# Altium PCB Hoang.PcbDoc
Units mm, origin at the board's own origin, x right, y up, seen from the top; angles counter-clockwise.
Board outline 79.99 x 80 mm, 4 copper layers (L1-T, L2-Power, L3-GND, L4-B), stack 0.778 mm thick; 96 components, 75 nets, 356 pads, 112 vias.
Unrouted connection lines stored in the file: 110.
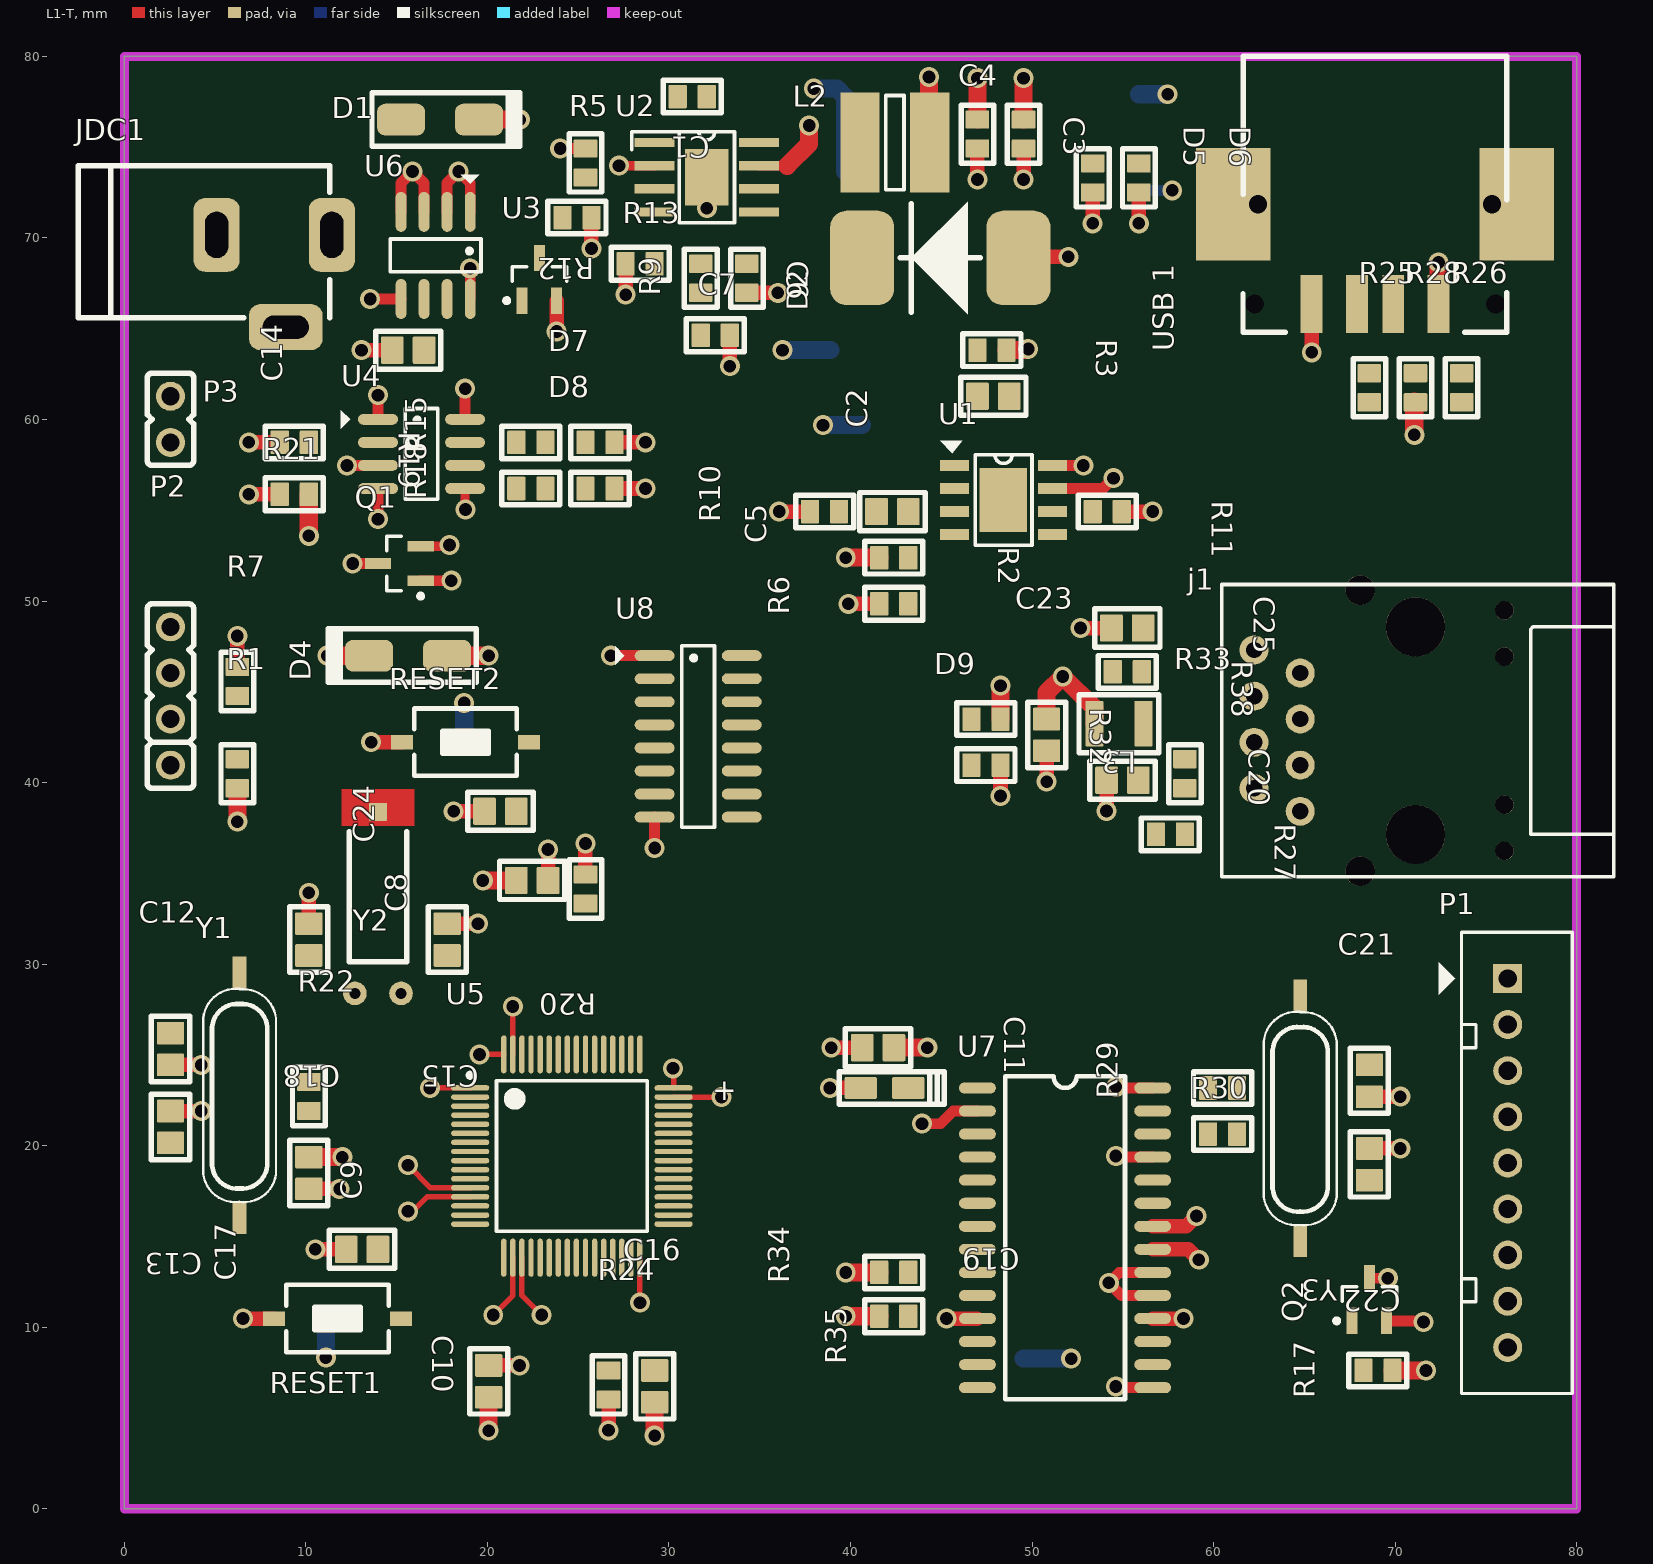
[diagram p0: L1-T view]
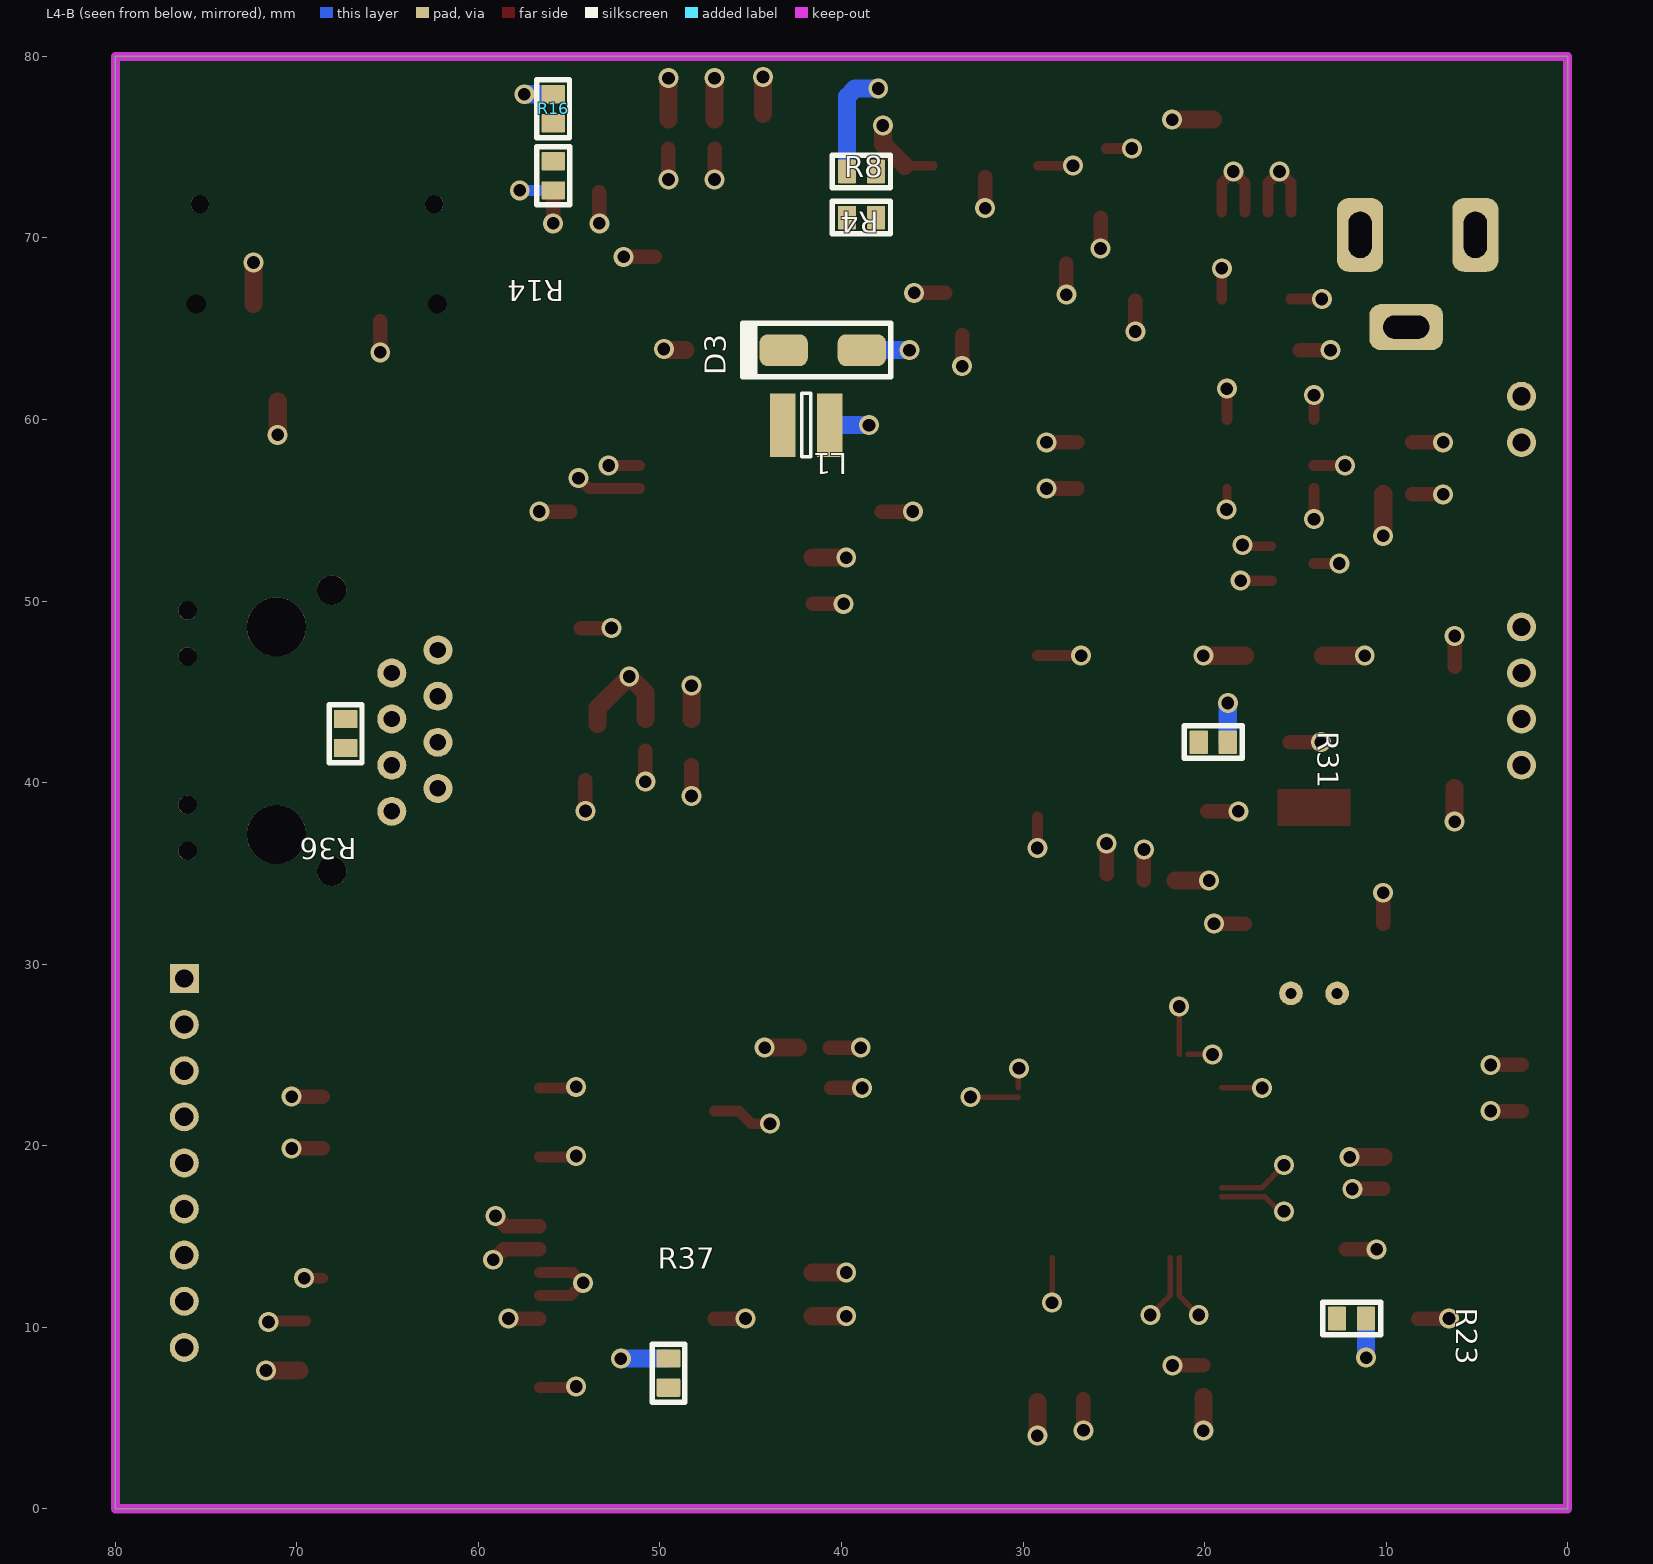
[diagram p1: L4-B view, seen from below]
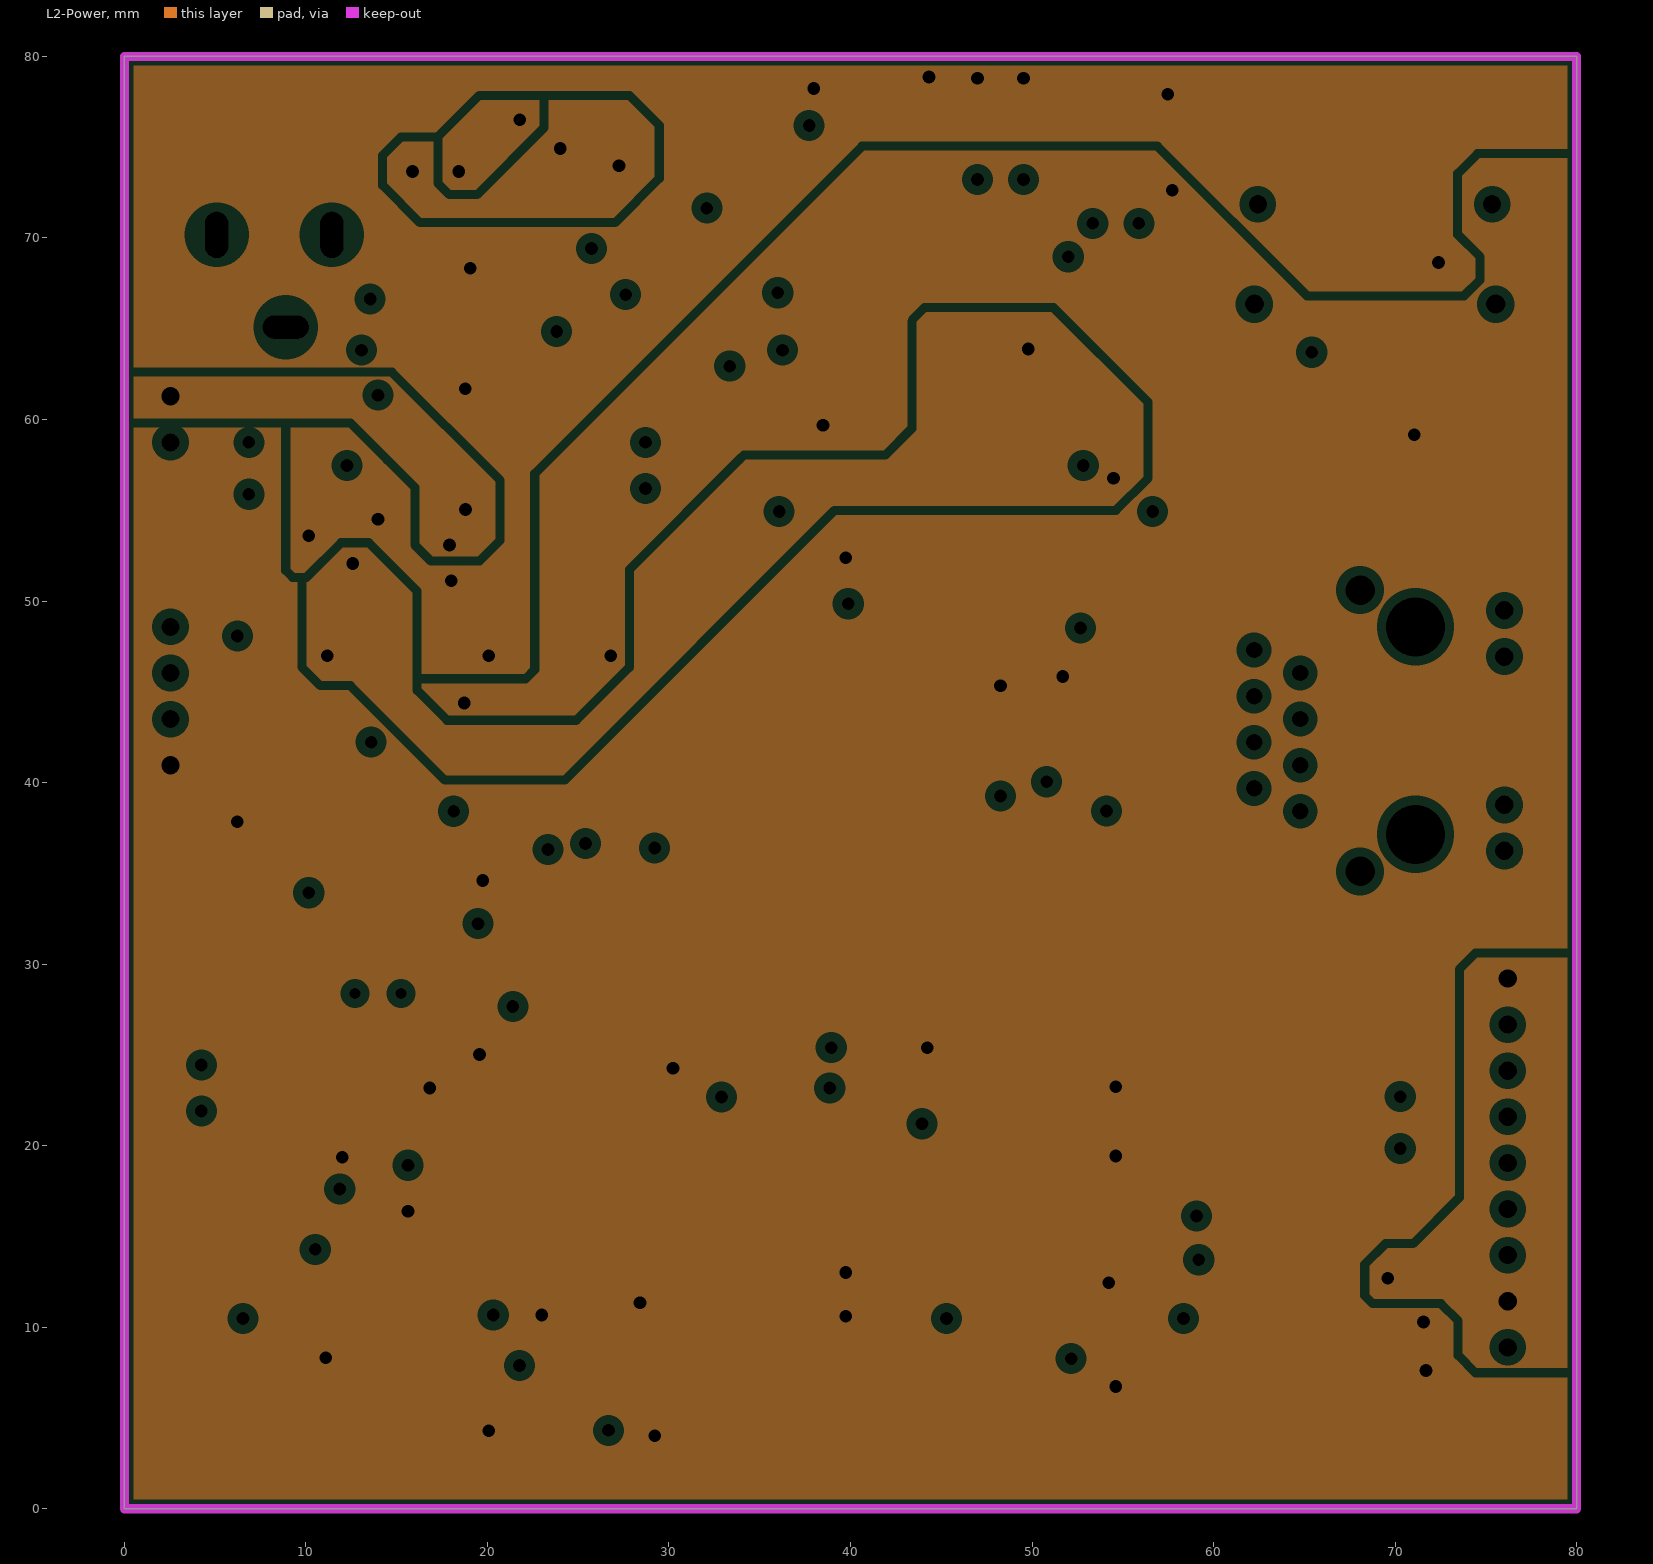
[diagram p2: L2-Power, clearances drawn from the general rule]
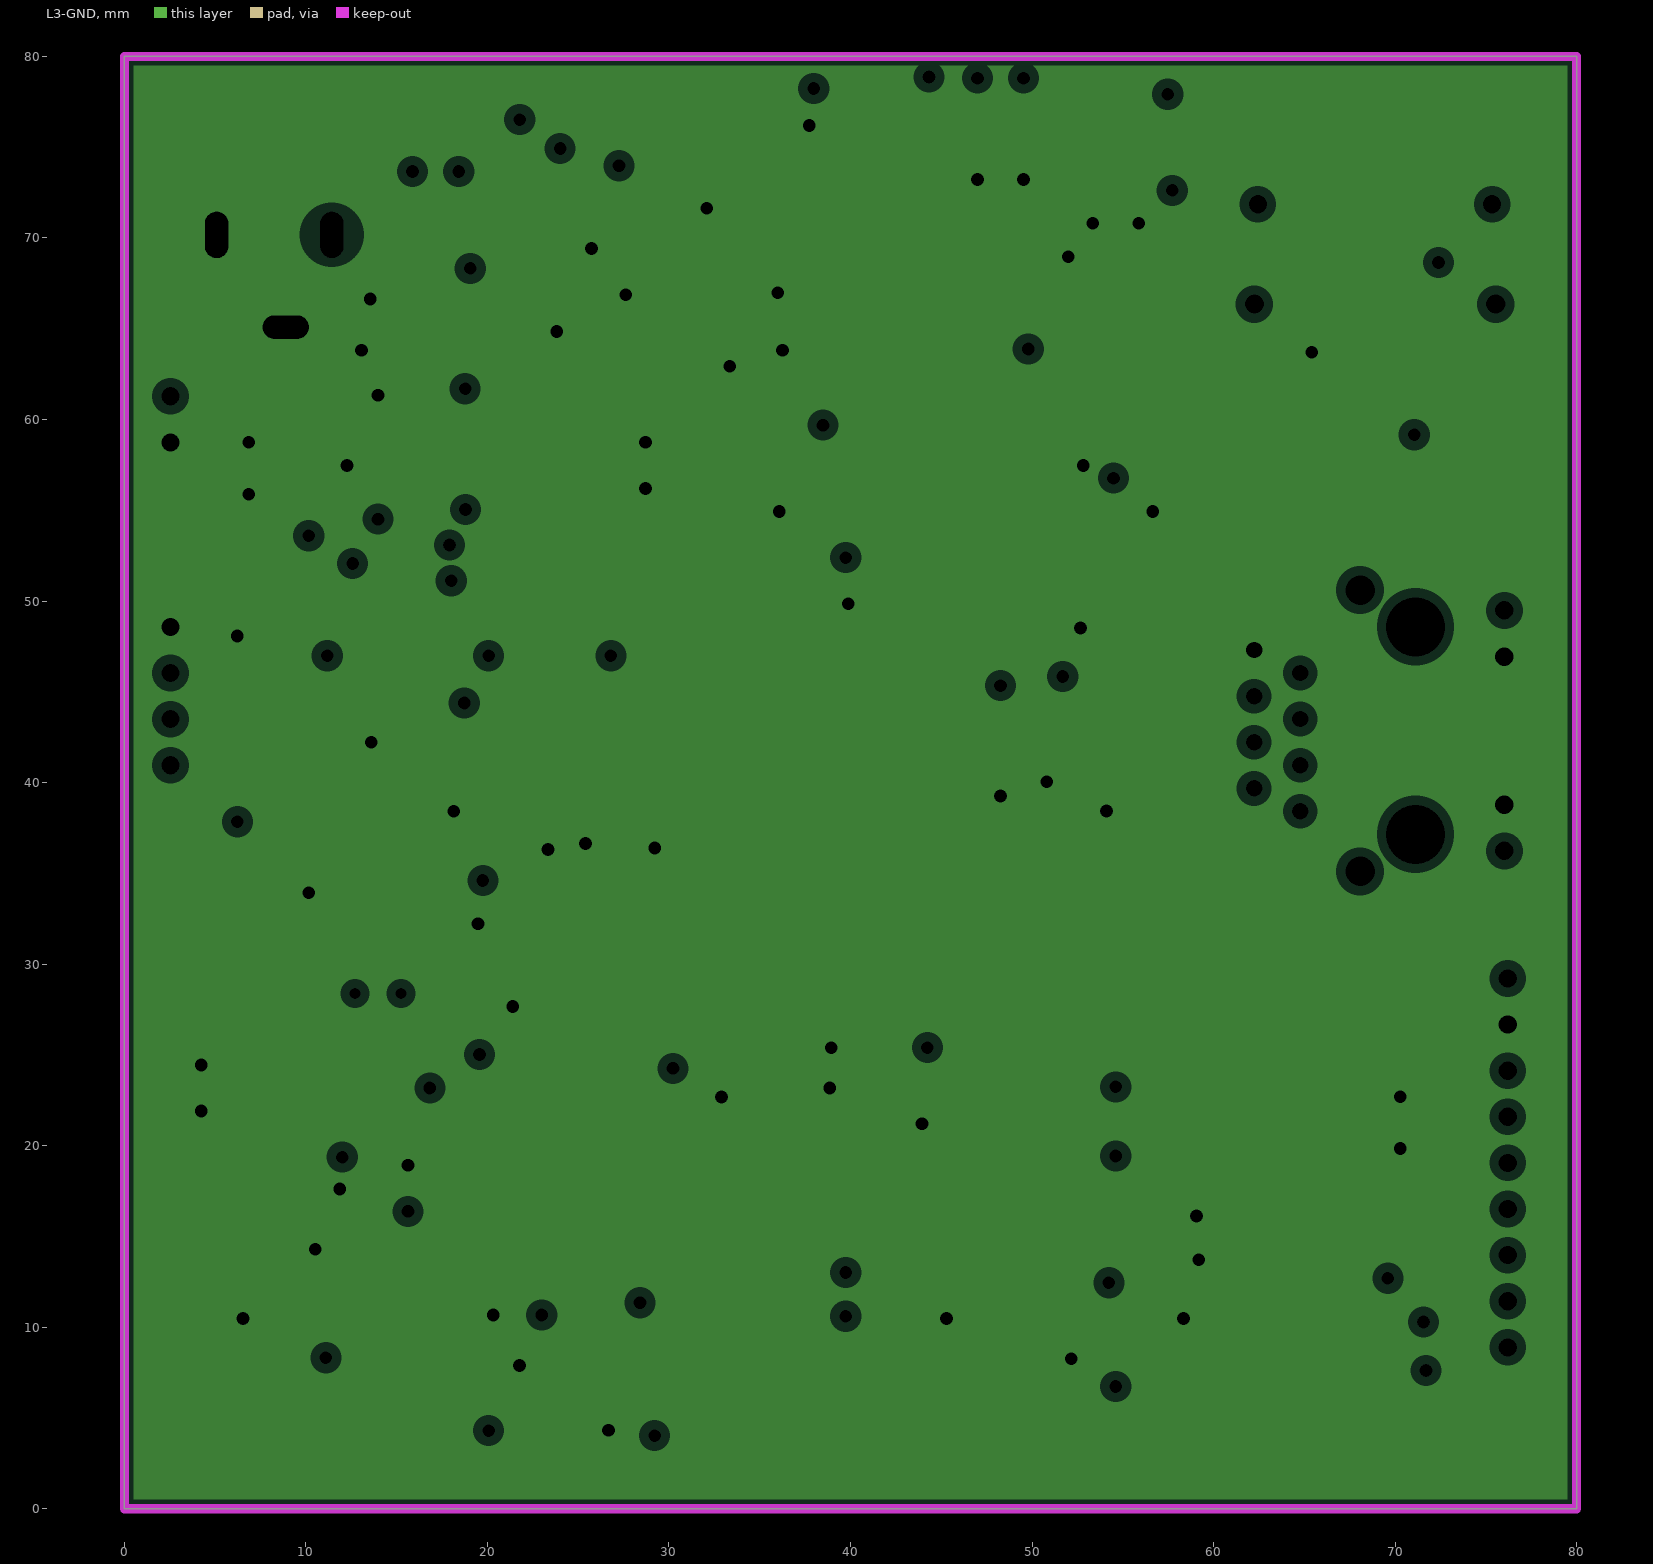
[diagram p3: L3-GND, clearances drawn from the general rule]

## Layer stack, top to bottom
Top Solder: solder mask 0.0102, Solder Resist, Dk 3.5
L1-T: signal copper 0.0356
Dielectric 1: core 0.254, FR-4, Dk 4.2
L2-Power: plane copper 0.036, net 3V3
Dielectric 4: prepreg 0.127, Dk 4.2
L3-GND: plane copper 0.036, net GND
Dielectric 3: core 0.254, Dk 4.2
L4-B: signal copper 0.0356
Bottom Solder: solder mask 0.0102, Solder Resist, Dk 3.5

## Board outline
0,0 0,79.999 79.995,79.999 79.995,0

## Design rules (kind name [scope] priority, off if disabled: settings)
Clearance [All] p1: gap=0.2 ignorepadtopadclearanceinfootprint=FALSE
PlaneClearance [All] p1: clearance=0.508
PlaneConnect [All] p1: planeconnectstyle=Relief reliefexpansion=0.508 reliefentries=4 reliefconductorwidth=0.254 reliefairgap=0.254
PolygonConnect [All] p1: connectstyle=Relief reliefconductorwidth=0.254 reliefentries=4 polygonreliefangle="90 Angle" airgapwidth=0.254
RoutingVias powerVias [InNetClass('power')] p1: holewidth=0.7 width=1.1 viastyle="Through Hole" minholewidth=0.7 minwidth=1.1 maxholewidth=0.7 maxwidth=1.1
RoutingVias signalVias [InNetClass('signal')] p2: holewidth=0.4 width=0.7 viastyle="Through Hole" minholewidth=0.4 minwidth=0.7 maxholewidth=0.4 maxwidth=0.7
SolderMaskExpansion [All] p1: expansion=0.102
Width power [InNetClass('power')] p1: maxlimit=1 minlimit=0.3 preferedwidth=0.8
Width signal [InNetClass('signal')] p2: maxlimit=0.2 minlimit=0.2 preferedwidth=0.2
28 further rules are at their usual default settings.

## Classes and differential pairs
net class signal: BOOT0 BOOT1 CONTROL_LCD CS_ETH CS_LCD D/C_LCD FB H_SENSOR_CURRENT H_USB_D+ H_USB_D- INT_ETH JTCK/SWCLK JTMS/SWDIO L_SENSOR_CURRENT L_USB_D+ L_USB_D- LEDA LEDB MISO_2 MOSI_2 NetC1_1 NetC1_2 NetC2_1 NetC2_2 NetC5_1 NetC5_2 NetC6_1 NetC7_1 NetC14_1 NetC19_1 NetC20_2 NetC21_2 NetC22_2 NetC25_2 NetD1_1 NetD5_1 NetD6_1 NetD7_1 NetD8_1 NetD9_1 NetR2_2 NetR3_1 NetR5_1 NetR11_1 NetR13_2 NetR15_2 NetR18_2 NetR19_2 NetR25_2 NetR26_2 NetR29_2 NetR30_2 NetR37_1 OSC_IN1 OSC_IN2 OSC_OUT1 OSC_OUT2 PW_EN PW_ON/OFF RESET RESET_ETH RESET_LCD SCK_2 TPIN+ TPIN- TPOUT+ TPOUT-
net class power: 3V3 DC5V_IN DC9V DC9V_IN GND V4.7V V_LCD VBAT

## Components (designator, comment, footprint, x,y, rotation, side; value= is the part's Value field where it differs from the comment)
C1 "Cap" RESC2012(0805) 31.28,77.789 r180 top value=104
C2 "Cap" C0805-2012 47.865,61.279 r180 top value=100n
C3 "Cap" RESC2012(0805) 49.53,75.719 r270 top value=47uF
C4 "Cap" RESC2012(0805) 46.99,75.719 r270 top value=47uF
C5 "Cap" C0805-2012 42.305,54.929 r180 top value=220p
C6 "Cap" RESC2012(0805) 34.29,67.78 r270 top value=39p
C7 "Cap" RESC2012(0805) 32.55,64.643 r0 top value=6800pF
C8 "Cap" C0805-2012 22.465,34.609 r180 top value=104
C9 "Cap" C0805-2012 10.16,18.494 r270 top value=104
C10 "Cap" C0805-2012 20.066,7.02 r90 top value=104
C11 "Cap" C0805-2012 41.515,25.4 r0 top value=104
C12 "Cap" C0805-2012 2.54,25.324 r90 top value=20pF
C13 "Cap" C0805-2012 2.54,21.034 r270 top value=20pF
C14 "Cap" C0805-2012 15.635,63.819 r180 top value=1nF
C15 "Cap" C0805-2012 17.78,31.355 r270 top value=12pF
C16 "Cap" C0805-2012 29.21,6.745 r90 top value=104
C17 "Cap" C0805-2012 13.095,14.289 r180 top value=104
C18 "Cap" C0805-2012 10.16,31.355 r270 top value=12pF
C19 "Cap Pol1" CAP_TANTA_10UF_10V 41.87,23.179 r180 top value=10uF
C20 "Cap" C0805-2012 54.977,40.132 r0 top value=0.01uF
C21 "Cap" C0805-2012 68.58,23.574 r90 top value=18pF
C22 "Cap" C0805-2012 68.58,18.974 r270 top value=18pF
C23 "Cap" C0805-2012 50.8,42.624 r90 top value=0.1uF
C24 "Cap" C0805-2012 20.715,38.419 r180 top value=104
C25 "Cap" C0805-2012 55.245,48.514 r0 top value=0.01uF
D1 "SS34" SS14 17.39,76.519 r0 top
D2 "B560C" SS34 44.945,68.899 r180 top
D3 "SS34" SS14 41.03,63.819 r0 bottom
D4 "SS34" SS14 15.63,46.99 r180 top
D5 "LED0" RESC2012(0805) 53.34,73.306 r270 top
D6 "LED0" RESC2012(0805) 55.88,73.306 r270 top
D7 "LED0" RESC2012(0805) 26.2,58.739 r0 top
D8 "LED0" RESC2012(0805) 26.2,56.199 r0 top
D9 "LED0" RESC2012(0805) 47.46,40.959 r0 top
j1 "HR911105A" HR911105A 64.77,38.419 r270 top
JDC1 "Jac DC" DC-IN 8.255,67.629 r0 top
L1 "Inductor" "CD32 - 2.2uH 3.5x3.3MM" 40.64,59.69 r0 bottom value=2.2uH
L2 "Inductor" "L-8.2uH CD53 SMD" 42.438,75.249 r0 top value=8.2uH
L3 "Inductor" INDUCTOR_TOKO_1UH 54.784,43.245 r180 top value=10uH
P1 "Header 9" CON9 76.2,19.05 r270 top
P2 "Header 4" Header_4 2.54,44.769 r90 top
P3 "4.7V LI-ION" Header_2 2.54,60.009 r270 top
Q1 "IRLML6402" SOT-23_M 15.145,52.07 r180 top
Q2 "IRLML6402" SOT-23_M 68.58,11.525 r90 top
R1 "Res1" RESC2012(0805) 6.223,40.489 r90 top value=10K
R2 "Res1" RESC2012(0805) 42.38,52.389 r0 top value=120K
R3 "Res1" RESC2012(0805) 47.79,63.819 r0 top value=10K
R4 "Res1" RESC2012(0805) 38.9,73.66 r0 bottom value=53.6k
R5 "Res1" RESC2012(0805) 25.4,74.13 r90 top value=523K
R6 "Res1" RESC2012(0805) 42.38,49.849 r180 top value=39K
R7 "Res1" RESC2012(0805) 6.223,45.569 r90 top value=10K
R8 "Res1" RESC2012(0805) 38.9,71.12 r180 bottom value=10.2k
R9 "Res1" RESC2012(0805) 31.75,67.78 r90 top value=13K
R10 "Res1" RESC2012(0805) 38.57,54.929 r180 top value=68K
R11 "Res1" RESC2012(0805) 54.14,54.929 r0 top value=200K
R12 "Res1" RESC2012(0805) 24.93,71.12 r180 top value=84.5K
R13 "Res1" RESC2012(0805) 28.41,68.58 r0 top value=163K
R14 "Res1" RESC2012(0805) 55.876,73.423 r270 bottom value=330
R15 "Res1" RESC2012(0805) 22.39,58.739 r180 top value=1K
R16 "Res1" RESC2012(0805) 55.88,77.116 r90 bottom value=1K
R17 "Res1" RESC2012(0805) 69.05,7.62 r0 top value=20K
R18 "Res1" RESC2012(0805) 22.39,56.199 r180 top value=1K
R19 "Res1" RESC2012(0805) 9.36,58.739 r0 top value=1.2K
R20 "Res1" RESC2012(0805) 25.4,34.139 r270 top value=10K
R21 "10K" RESC2012(0805) 9.36,55.88 r180 top
R22 "Res1" RESC2012(0805) 10.16,22.709 r90 top value=1M
R23 "Res1" RESC2012(0805) 11.9,10.479 r180 bottom value=10K
R24 "Res1" RESC2012(0805) 26.67,6.82 r90 top value=10K
R25 "Res1" RESC2012(0805) 68.58,61.749 r90 top value=22R
R26 "Res1" RESC2012(0805) 73.66,61.749 r90 top value=22R
R27 "Res1" RESC2012(0805) 57.62,37.149 r0 top value=50
R28 "Res1" RESC2012(0805) 71.12,61.749 r90 top value=1K5
R29 "Res1" RESC2012(0805) 60.49,23.179 r180 top value=1K
R30 "Res1" RESC2012(0805) 60.49,20.639 r180 top value=1K
R31 "Res1" RESC2012(0805) 19.52,42.229 r180 bottom value=10K
R32 "Res1" RESC2012(0805) 47.46,43.499 r0 top value=220
R33 "Res1" RESC2012(0805) 58.42,40.489 r90 top value=50
R34 "Res1" RESC2012(0805) 42.38,13.019 r180 top value=10K
R35 "Res1" RESC2012(0805) 42.38,10.606 r180 top value=10K
R36 "Res1" RESC2012(0805) 67.31,42.699 r270 bottom value=50
R37 "Res1" RESC2012(0805) 49.53,7.469 r90 bottom value=2.7K
R38 "Res1" RESC2012(0805) 55.245,46.101 r0 top value=50
RESET1 "SW" SW-SMD 11.74,10.479 r180 top value="SW chip 2 pin"
RESET2 "SW" SW-SMD 18.796,42.229 r180 top value="SW chip 2 pin"
U1 "MP1584EN-LF-Z" MP1584EN-LF-Z 45.72,57.469 r0 top
U2 "TPS54360" TPS54360 29.21,75.249 r0 top
U3 "PDTC114EU" SOT-23_M 22.86,67.724 r90 top
U4 "TP4056" SO-8 16.37,58.104 r0 top
U5 "STM32F103RCT6" LQFP64_M 24.65,19.429 r0 top
U6 "ACS712" SO-8 17.145,69.039 r270 top
U7 "ENC28J60" SOL-28 46.99,23.179 r0 top
U8 "74HC4050" SO-16 31.61,42.545 r0 top
"USB 1" "USB" "USB type A female" 72.39,66.359 r180 top
Y1 "8MHZ" Xtal-smd 6.35,22.773 r270 top
Y2 "32,768K" CR_32768 13.97,28.386 r0 top
Y3 "25MHZ" Xtal-smd 64.77,21.503 r270 top

## Footprints (in the part's own frame and the unit in brackets; to place one, negate y for a bottom-side part, rotate by r counter-clockwise, add the part's x,y. Pads: shape width x height; smd on the part's side, far side on the other; paste and mask are expansions set on the pad)
C0805-2012 [mm] "Chip Capacitor, 2-Leads, Body 2.0x1.3mm, IPC Medium Density"
  rrect10% 1.25x1.5 smd: 1(-0.875,0) 2(0.875,0)
  silkscreen extent -1.8,-1.05 1.8,1.05, body extent -1,-0.6 1,0.6, height 0.95
CAP_TANTA_10UF_10V [mm] "CAP TANTALUM TCJA 3216-18 1206 Body 3.2x1.6mm"
  rrect20% 1.8x1.23 smd: 1(-1.31,0) 2(1.31,0)
  silkscreen extent -3.3,-0.9 2.5,0.9, body extent -1.6,-0.8 1.6,0.8, height 1
"CD32 - 2.2uH 3.5x3.3MM" [mm]
  rect 1.4x3.5 smd: 1(0,0) 2(2.6,0)
  silkscreen extent 1.05,-1.75 1.55,1.75
CON9 [mm] "CON9"
  rect 1.6x1.6 hole 1 mask+0.1: 1(-10.16,0)
  round 1.6 hole 1 mask+0.1: 2(-7.62,0) 3(-5.08,0) 4(-2.54,0) 5(0,0) 6(2.54,0) 7(5.08,0) 8(7.62,0) 9(10.16,0)
  silkscreen extent -12.7,-3.8 12.7,3.56, body extent -12.55,-2.29 12.55,3.41, height 7
CR_32768 [mm] "32.768 KHz LOW FREQUENCY CYLINDRICALWATCH CRYSTAL"
  rrect10% 1x1 smd mask+0.1: 0(0,10)
  round 1.3 hole 0.6 mask+0.1: 1(-1.27,0) 2(1.27,0)
  L1-T region: -2,9.25 -2,11.25 2,11.25 2,9.25
  silkscreen extent -1.59,1.75 1.59,8.9, body extent -1.73,-0.6 1.73,10.18, height 3.2
DC-IN [mil] "Jac DC input"
  rrect50% 100x160 hole 50 slot 100 at 90 deg: 1(125,100) 2(-125,100)
  rrect50% 160x100 hole 50 slot 100 at 0 deg: 3(25,-100)
  silkscreen extent -425,-80 120,250, body extent -410,-105 134,269, height 434
Header_2 [mm] "Connector DIP, 2Pin_2.54mm"
  round 1.6 hole 1 mask+0.1: 1(-1.27,0) 2(1.27,0)
  silkscreen extent -2.54,-1.28 2.54,1.28, body extent -2.54,-1.27 2.54,1.27, height 10.1
Header_4 [mm] "Connector DIP, 4Pin_2.54mm"
  round 1.6 hole 1 mask+0.1: 1(-3.81,0) 2(-1.27,0) 3(1.27,0) 4(3.81,0)
  silkscreen extent -5.08,-1.28 5.08,1.28, body extent -5.08,-1.27 5.08,1.27, height 10.1
HR911105A [mm]
  round 1.63 hole 1.63: 0(-12.185,3.3) 0(3.305,3.3)
  round 3.25 hole 3.25: 0(-10.155,6.35) 0(1.275,6.35)
  round 1.6 hole 0.9: 1(0,0) 2(-1.26,-2.54) 3(-2.54,0) 4(-3.8,-2.54) 5(-5.08,0) 6(-6.34,-2.54) 7(-7.62,0) 8(-8.88,-2.54)
  round 1.02 hole 1.02: 9(2.185,11.25) 10(-0.355,11.25) 11(-8.525,11.25) 12(-11.065,11.25)
  silkscreen extent -12.49,-4.33 3.61,17.27, body extent -12.32,-4.1 3.56,17.3, height 13.8
INDUCTOR_TOKO_1UH [mm] "DFE322512C, 3.2x2.5x1mm"
  rrect10% 1x2.5 smd mask+0.1: 1(-1.35,0) 2(1.35,0)
  silkscreen extent -2.2,-1.6 2.2,1.6
"L-8.2uH CD53 SMD" [mm]
  rect 2.15x5.5 smd: 1(-1.925,0) 2(1.925,0)
  silkscreen extent -0.51,-2.6 0.51,2.6
LQFP64_M [mm] "Thin QFP, 64-Leads, Body 10x10mm, Pitch 0.5mm, IPC Low Density"
  oval 2.1x0.3 smd: 1(-5.6,3.75) 2(-5.6,3.25) 3(-5.6,2.75) 4(-5.6,2.25) 5(-5.6,1.75) 6(-5.6,1.25) 7(-5.6,0.75) 8(-5.6,0.25) 9(-5.6,-0.25) 10(-5.6,-0.75) 11(-5.6,-1.25) 12(-5.6,-1.75) 13(-5.6,-2.25) 14(-5.6,-2.75) 15(-5.6,-3.25) 16(-5.6,-3.75) 33(5.6,-3.75) 34(5.6,-3.25) 35(5.6,-2.75) 36(5.6,-2.25) 37(5.6,-1.75) 38(5.6,-1.25) 39(5.6,-0.75) 40(5.6,-0.25) 41(5.6,0.25) 42(5.6,0.75) 43(5.6,1.25) 44(5.6,1.75) 45(5.6,2.25) 46(5.6,2.75) 47(5.6,3.25) 48(5.6,3.75)
  oval 0.3x2.1 smd: 17(-3.75,-5.6) 18(-3.25,-5.6) 19(-2.75,-5.6) 20(-2.25,-5.6) 21(-1.75,-5.6) 22(-1.25,-5.6) 23(-0.75,-5.6) 24(-0.25,-5.6) 25(0.25,-5.6) 26(0.75,-5.6) 27(1.25,-5.6) 28(1.75,-5.6) 29(2.25,-5.6) 30(2.75,-5.6) 31(3.25,-5.6) 32(3.75,-5.6) 49(3.75,5.6) 50(3.25,5.6) 51(2.75,5.6) 52(2.25,5.6) 53(1.75,5.6) 54(1.25,5.6) 55(0.75,5.6) 56(0.25,5.6) 57(-0.25,5.6) 58(-0.75,5.6) 59(-1.25,5.6) 60(-1.75,5.6) 61(-2.25,5.6) 62(-2.75,5.6) 63(-3.25,5.6) 64(-3.75,5.6)
  silkscreen extent -5.72,-4.15 4.15,4.57, body extent -5,-5 5,5, height 1.6
MP1584EN-LF-Z [mm]
  rect 2.62x3.51 smd mask+0: 0(2.7,-1.905)
  rect 1.6x0.61 smd: 1(0,0) 2(0,-1.27) 3(0,-2.54) 4(0,-3.81) 5(5.4,-3.81) 6(5.4,-2.54) 7(5.4,-1.27) 8(5.4,0)
  silkscreen extent -0.77,-4.41 4.27,1.35, body extent -0.09,-4.31 5.69,0.59, height 1.45
RESC2012(0805) [mm] "Chip Resistor, Body 2.0x1.3mm, 1/8W 0805"
  rrect10% 1x1.3 smd: 1(-0.8,0) 2(0.8,0)
  silkscreen extent -1.6,-0.9 1.6,0.9, body extent -1,-0.62 1,0.63, height 0.6
SO-8 [mm] "8-Pin Small Outline Integrated Circuit 1.27 mm Pitch, IPC Medium Density"
  oval 2.2x0.6 smd: 1(-2.4,1.905) 2(-2.4,0.635) 3(-2.4,-0.635) 4(-2.4,-1.905) 5(2.4,-1.905) 6(2.4,-0.635) 7(2.4,0.635) 8(2.4,1.905)
  silkscreen extent -4.44,-2.5 0.9,2.5, body extent -1.95,-2.45 1.95,2.45, height 1.75
SO-16 [mm] "SOIC, 16-Leads, Body 9.9x3.9mm, Pitch 1.27mm, IPC Medium Density"
  oval 2.2x0.6 smd: 1(-2.4,4.445) 2(-2.4,3.175) 3(-2.4,1.905) 4(-2.4,0.635) 5(-2.4,-0.635) 6(-2.4,-1.905) 7(-2.4,-3.175) 8(-2.4,-4.445) 9(2.4,-4.445) 10(2.4,-3.175) 11(2.4,-1.905) 12(2.4,-0.635) 13(2.4,0.635) 14(2.4,1.905) 15(2.4,3.175) 16(2.4,4.445)
  silkscreen extent -4.57,-5 0.9,5, body extent -1.95,-4.95 1.95,4.95, height 1.75
SOL-28 [mil]
  oval 80x24 smd: 1(0,0) 2(0,-50) 3(0,-100) 4(0,-150) 5(0,-200) 6(0,-250) 7(0,-300) 8(0,-350) 9(0,-400) 10(0,-450) 11(0,-500) 12(0,-550) 13(0,-600) 14(0,-650) 15(380,-650) 16(380,-600) 17(380,-550) 18(380,-500) 19(380,-450) 20(380,-400) 21(380,-350) 22(380,-300) 23(380,-250) 24(380,-200) 25(380,-150) 26(380,-100) 27(380,-50) 28(380,0)
  silkscreen extent 60,-675 320,25, body extent -23,-681 394,31, height 99
SOT-23_M [mm] "SOT23, 3-Leads, Body 2.9x1.3mm, Pitch 0.95mm, Lead Span 2.5mm, IPC Low Density"
  rect 1.45x0.6 smd: 1(-1.175,0.95) 2(-1.175,-0.95) 3(1.175,0)
  silkscreen extent -1.3,-1.5 0.7,1.92, body extent -0.7,-1.5 0.7,1.5, height 1.1
SS14 [mm] "Diode SMD"
  rrect50% 2.65x1.75 smd: 1(-2.15,0) 2(2.15,0)
  silkscreen extent -3.75,-1.48 4.4,1.48, body extent -2.79,-1.98 2.79,1.97, height 2.6
SS34 [mm] "DIODE SMD DO-214AB"
  rrect50% 3.52x5.2 smd mask+0.1: 1(-4.305,0) 2(4.305,0)
  silkscreen extent -2.2,-3.1 2.2,3.1, body extent -4.07,-3.05 4.06,3.05, height 2.4
SW-SMD [mm] "Switch SMD type"
  rect 1.2x0.8 smd: 1(-3.5,0) 2(3.5,0)
  silkscreen extent -2.82,-1.85 2.82,1.85, body extent -3.05,-1.85 3.05,1.85, height 2.5
TPS54360 [mm]
  rect 2.2x0.5 smd mask+0.07: 1(0,0) 2(0,-1.27) 3(0,-2.54) 4(0,-3.81) 5(5.75,-3.81) 6(5.75,-2.54) 7(5.75,-1.27) 8(5.75,0)
  rect 2.4x3.1 smd mask+0: 9(2.875,-1.905)
  silkscreen extent -1.27,-4.41 4.4,0.6, body extent 0.06,-4.36 5.84,0.55, height 1.45
"USB type A female" [mm]
  rect 4.1x6.2 smd: 0(-4.3,-5.5) 0(11.3,-5.5)
  round 1 hole 1.05: 0(-3.15,0) 0(10.15,0)
  round 1 hole 1: 0(-2.95,-5.5) 0(9.95,-5.5)
  rect 1.2x3.2 smd: 1(0,0) 2(2.5,0) 3(4.5,0) 4(7,0)
  silkscreen extent -3.75,-13.65 10.77,1.55, body extent -3.14,-14.22 11.36,0.98, height 7.36
Xtal-smd [mil] "Footpin for Crystal 2 pin"
  rect 70x30 smd: 1(266,0) 2(-266,0)
  silkscreen extent -231,-79 232,79, body extent -250,-95 250,90, height 165

## Part data
C1 C2 C3 C4 C5 C6 C7 C8 C9 C10 C11 C12 C13 C14 C15 C16 C17 C18 C20 C21 C22 C23 C24 C25: "Capacitor", LatestRevisionDate=17-Jul-2002, LatestRevisionNote="Re-released for DXP Platform.", PackageReference=RAD-0.3, Published=8-Jun-2000, Publisher="Altium Limited"
  C2 C5 C8 C9 C10 C11 C12 C13 C14 C15 C16 C17 C18 C20 C21 C22 C23 C24 C25: PackageDescription="Radial Cap, Thru-Hole; 2 Leads; 0.3 in Pin Spacing"
C19: "Polarized Capacitor (Radial)", LatestRevisionDate=17-Jul-2002, LatestRevisionNote="Re-released for DXP Platform.", PackageDescription="Polarized Capacitor (Radial); 2 Leads", PackageReference=RB7.6-15, Published=8-Jun-2000, Publisher="Altium Limited"
D1 D3 D4: library part "D Schottky", "Schottky Diode", Code_JEDEC=DO-214-AA, LatestRevisionDate=17-Jul-2002, LatestRevisionNote="Re-released for DXP Platform.", PackageDescription="DO-214-AA/SMB; 2 C-Bend Leads; Body 5.3 x 3.6 mm, inc. leads (LxW)", PackageReference=SMB, Published=8-Jun-2000, Publisher="Altium Limited"
D2: library part "D Zener", "Zener Diode", LatestRevisionDate=17-Jul-2002, LatestRevisionNote="Re-released for DXP Platform.", PackageReference=DIODE-0.7, Published=8-Jun-2000, Publisher="Altium Limited"
D5 D6 D7 D8 D9: "Typical INFRARED GaAs LED", LatestRevisionDate=08-Jul-2005, LatestRevisionNote="Mech Layer 1 removed.", PackageDescription="LED; 2 Leads", PackageReference=LED-0, Published=8-Jun-2000, Publisher="Altium Limited"
j1: "Ethernet Connector"
JDC1: library part DCIN, "Jac DC input"
P1: "Header, 9-Pin", LatestRevisionDate=17-Jul-2002, LatestRevisionNote="Re-released for DXP Platform.", Publisher="Altium Limited"
P2: "Header, 4-Pin", LatestRevisionDate=17-Jul-2002, LatestRevisionNote="Re-released for DXP Platform.", Publisher="Altium Limited"
P3: library part "Header 2", "Header, 2-Pin", LatestRevisionDate=17-Jul-2002, LatestRevisionNote="Re-released for DXP Platform.", Publisher="Altium Limited"
Q1 Q2: library part 8#IRLML9301TRPBF, "MOSFET MOSFT P-Ch -60V -15A", Case/Package=SOT-23, Continuous Drain Current (ID)=3.6A, Drain to Source Breakdown Voltage=-30V, Drain to Source Resistance=103mR, Drain to Source Voltage (Vdss)=30V, Gate to Source Voltage (Vgs)=20V, Input Capacitance=388pF, Manufacturer="International Rectifier", Manufacturer Part Number=IRLML9301TRPBF, Max Operating Temperature=150°C, Max Power Dissipation=1.3W, Min Operating Temperature=-55°C, On-State Resistance=64MR, Package Quantity=1, Supplier Part Number 1=1829137, Threshold Voltage=-1.3V, Element Configuration=Single, Fall Time=15ns, Height=1.02mm, Lead Free="Lead Free", Length=3.04mm, Mount="Surface Mount", Nominal Vgs=-1.3V, Number of Elements=1, Number of Pins=3, Packaging="Tape and Reel", Power Dissipation=1.3W, Radiation Hardening=No, Rds On Max=64mR, REACH SVHC="No SVHC", Recovery Time=21ns, Rise Time=19ns, Supplier 1=Farnell, Turn-Off Delay Time=16ns, Turn-On Delay Time=9.6ns, Width=1.4mm
R1 R2 R3 R4 R5 R6 R7 R8 R9 R10 R11 R12 R13 R14 R15 R16 R17 R18 R19 R20 R22 R23 R24 R25 R26 R27 R28 R29 R30 R31 R32 R33 R34 R35 R36 R37 R38: "Resistor", LatestRevisionDate=17-Jul-2002, LatestRevisionNote="Re-released for DXP Platform.", PackageReference=AXIAL-0.3, Published=8-Jun-2000, Publisher="Altium Limited"
  R1 R2 R3 R6 R7 R10 R11 R14 R15 R16 R17 R18 R19 R20 R22 R23 R24 R25 R26 R27 R28 R29 R30 R31 R32 R33 R34 R35 R36 R37 R38: PackageDescription="Axial Device, Thru-Hole; 2 Leads; 0.3 in Pin Spacing"
R21: library part 10K/R0603/1%, "RES SMD 10K OHM 1% 1/10W 0603", Manufacturer=Yageo, Manufacturer Part Number=RC0603FR-0710KL, Operating Temperature="-55°C ~ 155°C", Package / Case="0603 (1608 Metric)", Power (Watts)="0.1W, 1/10W", Resistance (Ohms)=10k, Supplier Device Package=0603, Supplier Part Number 1=311-10.0KHRTR-ND, Temperature Coefficient=±100ppm/°C, Tolerance=±1%, Category=Resistors, ComponentLink1Description=http://www.yageo.com/NewPortal/yageodocoutput?fileName=/pdf/R-Chip/PYu-RC_Group_51_RoHS_L_3.pdf, ComponentLink1URL=http://www.yageo.com/NewPortal/yageodocoutput?fileName=/pdf/R-Chip/PYu-RC_Group_51_RoHS_L_3.pdf, Composition="Thick Film", Features="Moisture Resistant", Height="0.022\" (0.55mm)", Number of Terminations=2, Packaging="Tape & Reel (TR)", Pricing 1="5000=0.00167, 10000=0.00145, 25000=0.00128, 50000=0.00117, 125000=0.00115 (USD)", RoHS="RoHS Compliant", Size / Dimension="0.063\" L x 0.031\" W (1.60mm x 0.80mm)", Stock 1=11440000, Supplier 1=Digi-Key
RESET1 RESET2: library part SW2, "Switch button 2 pin"
U1: "3A, 1.5HZ, 28V Step-Down Converter"
U6: "Current Sensor"
U7: "Stand-Alone Ethernet Controller with SPI Interface"
U8: "74HC4050 Non-Inv Hex Logic Down Coverter"
"USB 1": library part USB_MH, "USB conector"
Y1 Y2 Y3: library part XTAL, "Crystal Oscillator", LatestRevisionDate=17-Jul-2002, LatestRevisionNote="Re-released for DXP Platform.", PackageDescription="Crystal, Thru-Hole; 2 Leads; Body 3.1 x 8.2 mm (Dia.xH)", PackageReference=R38, Published=8-Jun-2000, Publisher="Altium Limited"
L1 L2 L3: Code_IEC=1005, Code_JEITA=0402, LatestRevisionDate=29-May-2009, LatestRevisionNote="IPC-7351 Footprint Added.", PackageDescription="Chip Inductor", PackageReference=0402-A, Published=8-Jun-2000, Publisher="Altium Limited"

## Via types
v1: diameter 1.1, hole 0.7, L1-T to L4-B, 112 vias

## Nets (pads, with @x,y where several pads share a name; then routed paths per layer and width w, separated by ;. In a path a pad name is that pad's centre, name@x,y a point inside that pad or via, vN(x,y) a via of type N, cw(c..) or ccw(c..) an arc to the next point about the centre after c; other vN are vias at no path point)
3V3: C8.2 C9.1 C10.1 C11.2 C16.1 C23.2 L1.1 L3.2 P2.1 Q2.2 R1.1 R2.1 R14.2 R17.2 R23.2 R28.1 R31.2 R32.2 R34.2 R35.2 U5.1 U5.13 U5.19 U5.32 U5.48 U5.64 U7.15 U7.19 U7.20 U7.25 U7.28 U8.1 | length 67.2
  L1-T w0.3: v1(15.621,16.383) 15.875,16.383 16.671,17.179 U5.13 ; v1@16.699,23.179 v1(16.829,23.179) U5.1 ; v1(19.558,25.019) 19.568,25.029 U5.64 ; U5.19 21.9,11.755 v1(22.987,10.668) ; v1(28.4,11.351) U5.32 ; v1(30.226,24.257) 30.25,24.233 U5.48
  L1-T w0.6: v1(26.797,46.99) U8.1 ; v1(54.61,6.731) 54.672,6.669 U7.15 ; v1(54.61,19.431) 54.672,19.369 U7.25 ; v1(54.61,23.241) 54.672,23.179 U7.28 ; U7.19 54.926,11.749 v1(54.229,12.446) 54.802,13.019 U7.20 ; Q2.2 71.5,10.35 v1(71.562,10.288)
  L1-T w1: v1(6.223,37.846) R1.1 ; C9.1 v1(12.003,19.369) ; v1(19.747,34.609) C8.2 ; v1(20.066,4.302) C10.1 ; v1(29.21,4.027) C16.1 ; v1(39.737,10.606) R35.2 ; v1(39.737,13.019) R34.2 ; v1(39.737,52.389) R2.1 ; C11.2 v1(44.233,25.4) ; R32.2 v1(48.26,45.342) ; C23.2 50.8,44.958 v1(51.689,45.847) 53.434,44.102 L3.2 ; R17.2 v1(71.693,7.62) ; v1(71.055,59.157) R28.1@71.055,61
  L4-B w0: v1@11.1,8.193 v1(11.1,8.32)
  L4-B w0.6: R14.2 v1(57.721,72.623)
  L4-B w1: v1(11.1,8.32) R23.2 ; R31.2 v1(18.72,44.388) ; v1(38.481,59.69) L1.1
BOOT0: R20.2 U5.60
BOOT1: R24.2 U5.28
CONTROL_LCD: Q2.1 R17.1 U5.21 U5.24
CS_ETH: R34.1 U5.38 U7.9
CS_LCD: P1.3 U5.33
D/C_LCD: P1.5 U5.37
DC5V_IN: "USB 1.1" C3.1 C4.1 D4.1 L2.2 Q1.1 R4.2 R16.2 R21.1 U4.4 U4.8 U6.8 | length 27.8
  L1-T w0.6: v1(13.97,54.512) U4.4 ; Q1.1 v1(18.007,51.12) ; U4.8 v1(18.77,61.696) ; U6.8 v1(19.05,68.326)
  L1-T w1: v1(10.16,53.594) R21.1 ; D4.1 v1(20.066,46.99) ; L2.2@44.323,76.835 v1(44.323,78.867) ; C4.1 v1(46.99,78.805) ; C3.1 v1(49.53,78.805) ; 72.39,66.359 v1(72.39,68.645)
  L4-B w1: v1(37.973,78.232) 39.243,78.232 39.7,77.775 R4.2 ; R16.2 v1(57.469,77.916)
DC9V: D1.2 U6.1 U6.2 | length 7.2
  L1-T w0.6: U6.2 17.78,73.025 v1(18.415,73.66) 19.05,73.025 U6.1
  L1-T w1: D1.2 v1(21.782,76.519)
DC9V_IN: R5.2 U2.2 U6.3 U6.4 | length 8.5
  L1-T w0.5: v1(27.243,73.979) U2.2
  L1-T w0.6: U6.4 15.24,73.025 v1(15.875,73.66) 16.51,73.025 U6.3 ; v1@23.876,74.93 v1(24.003,74.93) R5.2
FB: R4.1 R8.2 U2.5
GND: "USB 1.4" C3.2 C4.2 C6.2 C7.2 C8.1 C9.2 C10.2 C11.1 C12.1 C13.1 C14.2 C15.1 C16.2 C17.2 C18.1 C19.2 C20.1 C21.1 C22.1 C23.1 C24.2 C25.1 D2.1 D3.1 D5.2 D6.2 D7.2 D8.2 D9.2 j1.8 j1.10 j1.11 JDC1.2 JDC1.3 P1.2 P2.4 P3.2 R6.2 R7.2 R8.1 R10.2 R11.2 R12.1 R13.1 R19.1 R20.1 R21.2 R24.1 R37.2 RESET1.2 RESET2.2 U1.8 U2.7 U2.9 U3.2 U4.1 U4.3 U5.12 U5.18 U5.31 U5.47 U5.63 U6.5 U7.2 U7.11 U7.18 U7.21 U7.22 U8.8 | length 114.1
  L1-T w0.3: v1(15.621,18.923) 16.865,17.679 U5.12 ; v1(20.32,10.668) 21.4,11.748 U5.18 ; U5.63 v1(21.4,27.67) ; U5.47 v1(32.891,22.679)
  L1-T w0.5: U2.7 36.514,73.979
  L1-T w0.6: v1(12.268,57.469) U4.3 ; v1(13.538,66.639) U6.5 ; U4.1 v1(13.97,61.341) ; v1(29.21,36.398) U8.8 ; v1(43.942,21.209) 44.958,21.209 45.658,21.909 U7.2 ; U1.8 v1(52.822,57.469)
  L1-T w0.8: C13.1 v1(4.242,21.909) ; C12.1 v1(4.242,24.449) ; R7.2 v1(6.223,48.071) ; v1(6.538,10.479) RESET1.2 ; v1(6.858,55.88) R21.2 ; v1(6.858,58.739) R19.1 ; C9.2 v1(11.862,17.619) ; C18.1 v1(10.16,33.932) ; v1(10.518,14.289) C17.2 ; v1(13.058,63.819) C14.2 ; v1(13.594,42.229) RESET2.2 ; C15.1 v1(19.482,32.23) ; v1(18.138,38.419) C24.2 ; C10.2 v1(21.768,7.895) ; C8.1 v1(23.34,36.311) ; v1(23.81,64.847) U3.2 ; R20.1 v1(25.4,36.641) ; v1(25.73,69.418) R12.1 ; v1(26.67,4.318) R24.1 ; D8.2 v1(28.702,56.199) ; D7.2 v1(28.702,58.739) ; v1(27.61,66.878) R13.1 ; v1(32.085,71.642) U2.9 ; v1(33.35,62.941) C7.2 ; C6.2 v1(35.992,66.98) ; v1(36.068,54.929) R10.2 ; v1(38.858,23.179) C19.2 ; v1(38.938,25.4) C11.1 ; v1(39.878,49.849) R6.2 ; v1(45.288,10.479) U7.11 ; v1(46.99,73.217) C4.2 ; v1(48.26,39.257) D9.2 ; v1(49.53,73.217) C3.2 ; D2.1@50.292,68.961 v1(51.994,68.961) ; v1(50.8,40.047) C23.1 ; v1(52.668,48.514) C25.1 ; v1(53.34,70.804) D5.2 ; v1(54.102,38.43) C20.1 ; R11.2 v1(56.642,54.929) ; v1(55.88,70.804) D6.2 ; U7.18 v1(58.344,10.479) ; U7.21 58.609,14.289 v1(59.182,13.716) ; U7.22 58.485,15.559 v1(59.055,16.129) ; v1(65.405,63.703) 65.405,65.405 ; C22.1 v1(70.282,19.849) ; C21.1 v1(70.282,22.699)
  L1-T w1: 36.514,73.979 37.719,75.184 v1(37.719,76.2)
  L4-B w1: v1(36.257,63.819) D3.1 ; R37.2 v1(52.153,8.269)
H_SENSOR_CURRENT: U6.7 U8.14
H_USB_D+: R25.1 U8.7
H_USB_D-: R26.1 U8.5
INT_ETH: U5.22 U7.4
JTCK/SWCLK: P2.3 R7.1 U5.49
JTMS/SWDIO: P2.2 R1.2 U5.46
L_SENSOR_CURRENT: U5.26 U8.15
L_USB_D+: U5.45 U8.6
L_USB_D-: U5.44 U8.4
LEDA: j1.9 R29.1
LEDB: j1.12 R30.1
MISO_2: P1.9 U5.35 U7.6
MOSI_2: P1.6 U5.36 U7.7
NetC1_1: C1.1 D2.2 L2.1 U2.8
NetC1_2: C1.2 U2.1
NetC2_1: C2.1 U1.5
NetC2_2: C2.2 D3.2 L1.2 U1.1
NetC5_1: C5.1 U1.3
NetC5_2: C5.2 R10.1
NetC6_1: C6.1 R9.2 U2.6
NetC7_1: C7.1 R9.1
NetC14_1: C14.1 U6.6
NetC19_1: C19.1 U7.1
NetC20_2: C20.2 j1.4 L3.1 R27.1 R33.2
NetC21_2: C21.2 U7.24 Y3.2
NetC22_2: C22.2 U7.23 Y3.1
NetC25_2: C25.2 j1.5 R36.1 R38.2
NetD1_1: D1.1 JDC1.1
NetD5_1: D5.1 R14.1
NetD6_1: D6.1 R16.1
NetD7_1: D7.1 R15.1
NetD8_1: D8.1 R18.1
NetD9_1: D9.1 R32.1
NetR2_2: R2.2 R6.1 U1.4
NetR3_1: R3.1 U1.2
NetR5_1: R5.1 R12.2 U2.3 U3.3
NetR11_1: R11.1 U1.6
NetR13_2: R13.2 U2.4
NetR15_2: R15.2 U4.7
NetR18_2: R18.2 U4.6
NetR19_2: R19.2 U4.2
NetR25_2: "USB 1.3" R25.2
NetR26_2: "USB 1.2" R26.2 R28.2
NetR29_2: R29.2 U7.27
NetR30_2: R30.2 U7.26
NetR37_1: R37.1 U7.14
OSC_IN1: C15.2 U5.3 Y2.2
OSC_IN2: C12.2 R22.2 U5.5 Y1.2
OSC_OUT1: C18.2 U5.4 Y2.1
OSC_OUT2: C13.2 R22.1 U5.6 Y1.1
PW_EN: U3.1 U5.20
PW_ON/OFF: C24.1 R31.1 RESET2.1 U5.54
RESET: C17.1 R23.1 RESET1.1 U5.7
RESET_ETH: R35.1 U5.39 U7.10
RESET_LCD: P1.4 U5.41
SCK_2: P1.7 U5.34 U7.8
TPIN+: j1.3 R36.2 U7.13
TPIN-: j1.6 R38.1 U7.12
TPOUT+: j1.1 R27.2 U7.17
TPOUT-: j1.2 R33.1 U7.16
V4.7V: D4.2 Q1.3 R3.2 U1.7 | length 8.5
  L1-T w0: v1@49.66,63.754 v1(49.787,63.881)
  L1-T w0.6: v1(12.573,52.07) Q1.3 ; U1.7 53.913,56.199 v1(54.483,56.769)
  L1-T w1: v1(11.176,46.99) D4.2 ; R3.2 v1@49.595,63.819
V_LCD: P1.1 P1.8 Q2.3 | length 1
  L1-T w0.6: Q2.3 v1(69.596,12.7)
VBAT: P3.1 Q1.2 U4.5 | length 3
  L1-T w0.5: Q1.2 17.973,53.02 v1(17.907,53.086) ; U4.5 18.77,55.017 v1(18.796,55.043)
pads on no net: "USB 1.0" j1.0 j1.7 U1.0 U5.2 U5.8 U5.9 U5.10 U5.11 U5.14 U5.15 U5.16 U5.17 U5.23 U5.25 U5.27 U5.29 U5.30 U5.40 U5.42 U5.43 U5.50 U5.51 U5.52 U5.53 U5.55 U5.56 U5.57 U5.58 U5.59 U5.61 U5.62 U7.3 U7.5 U8.2 U8.3 U8.9 U8.10 U8.11 U8.12 U8.13 U8.16 Y2.0

## Polygon pours and split planes (outlines as drawn)
GND on L3-GND (split plane): 79.485,0.51 0.51,0.51 0.51,79.489 79.485,79.489
DC9V_IN on L2-Power (split plane): 29.214,76.093 29.212,76.073 29.212,73.383 26.926,71.097 16.381,71.097 14.476,73.002 14.476,74.445 15.344,75.313 17.02,75.313 17.02,75.311 17.02,73.025 17.028,72.96 17.054,72.899 17.094,72.847 17.729,72.212 17.751,72.194 17.781,72.172 17.842,72.146 17.907,72.138 19.431,72.138 19.496,72.146 19.557,72.172 19.609,72.212 23.292,75.895 23.332,75.947 23.358,76.008 23.366,76.073 23.366,77.599 27.709,77.599
DC9V on L2-Power (split plane): 22.862,76.177 19.327,72.642 18.011,72.642 17.524,73.129 17.524,75.461 19.662,77.599 22.862,77.599
V_LCD on L2-Power (split plane): 79.485,7.745 74.526,7.745 73.722,8.55 73.722,10.351 73.713,10.416 73.688,10.477 73.648,10.529 72.695,11.481 72.643,11.521 72.582,11.547 72.517,11.555 68.868,11.555 68.578,11.845 68.578,13.358 69.573,14.353 70.993,14.353 71.058,14.361 71.119,14.387 71.171,14.427 73.711,16.967 73.734,16.996 73.751,17.019 73.759,17.037 73.777,17.08 73.785,17.145 73.785,29.614 74.526,30.355 79.485,30.355
V4.7V on L2-Power (split plane): 56.136,60.856 56.136,56.873 54.506,55.243 39.116,55.243 39.051,55.235 38.99,55.209 38.96,55.187 38.938,55.169 24.153,40.384 17.757,40.384 12.624,45.517 12.572,45.557 12.511,45.583 12.446,45.591 10.899,45.591 10.029,46.462 10.029,46.611 10.029,51.056 10.033,51.056 10.098,51.064 10.159,51.09 10.211,51.13 12.042,52.961 13.358,52.961 15.877,50.442 15.877,46.228 15.877,45.72 15.877,45.085 15.885,45.02 15.911,44.959 15.951,44.907 16.332,44.526 17.602,43.256 17.654,43.216 17.715,43.19 17.78,43.182 24.892,43.182 24.957,43.19 25.018,43.216 25.07,43.256 27.991,46.177 28.014,46.206 28.031,46.229 28.039,46.247 28.057,46.29 28.065,46.355 28.065,47.498 28.065,51.624 34.048,57.607 34.228,57.787 41.91,57.787 41.975,57.795 42.036,57.821 42.088,57.861 43.563,59.335 43.603,59.387 43.628,59.448 43.637,59.513 43.637,59.613 43.637,65.378 44.173,65.915 51.077,65.915
DC5V_IN on L2-Power (split plane): 79.485,74.894 74.543,74.894 74.478,74.885 74.435,74.867 74.417,74.86 74.395,74.843 74.365,74.82 73.266,73.721 73.226,73.669 73.201,73.608 73.192,73.543 73.192,70.19 73.201,70.125 73.226,70.064 73.266,70.012 74.424,68.854 74.424,67.795 73.683,67.054 65.255,67.054 57.074,75.235 57.022,75.275 56.961,75.301 56.896,75.309 40.64,75.309 40.575,75.301 40.514,75.275 40.484,75.253 40.462,75.235 22.428,57.201 22.388,57.149 22.362,57.088 22.354,57.023 22.354,46.332 21.994,45.972 16.381,45.972 16.381,46.228 16.381,50.546 16.373,50.611 16.347,50.672 16.307,50.724 13.64,53.391 13.588,53.431 13.527,53.457 13.462,53.465 11.938,53.465 11.873,53.457 11.812,53.431 11.76,53.391 9.929,51.56 9.375,51.56 9.142,51.793 9.142,52.324 9.142,59.565 12.342,59.565 14.3,57.607 15.75,56.157 15.75,53.086 15.758,53.021 15.784,52.96 15.824,52.908 16.713,52.019 16.765,51.979 16.826,51.953 16.891,51.945 19.558,51.945 19.623,51.953 19.684,51.979 19.736,52.019 20.879,53.162 20.919,53.214 20.945,53.275 20.953,53.34 20.953,56.642 20.945,56.707 20.919,56.768 20.879,56.82 14.91,62.789 14.858,62.829 14.797,62.855 14.732,62.863 0.51,62.863 0.51,79.489 79.485,79.489
VBAT on L2-Power (split plane): 20.449,56.538 20.449,53.444 19.454,52.449 16.995,52.449 16.254,53.19 16.254,56.261 16.246,56.326 16.22,56.387 16.18,56.439 14.656,57.963 12.624,59.995 12.572,60.035 12.511,60.061 12.446,60.069 0.51,60.069 0.51,62.359 14.628,62.359
3V3 on L2-Power (split plane): 154 vertices, not listed, extent 0.51,0.51 79.485,74.805

## Keep-outs
Keep-Out Layer:
  the board outline again, w0.5

## Other copper
L2-Power (plane layer: these items are gaps in the copper):
  lines w0.5: 0,59.817 11.43,59.817 ; 0,62.611 14.732,62.611 20.701,56.642 20.701,53.34 19.558,52.197 16.891,52.197 16.002,53.086 16.002,56.261 14.478,57.785 12.446,59.817 8.89,59.817 8.89,52.324 8.89,51.689 9.271,51.308 9.906,51.308 ; 16.129,46.228 16.129,45.085 ; 16.51,44.704 16.129,45.085 ; 17.272,75.311 17.272,75.565 ; 22.86,77.851 23.114,77.851 23.114,76.073 19.431,72.39 17.907,72.39 17.272,73.025 17.272,75.565 ; 27.813,47.244 27.813,51.729 33.994,57.91 ; 27.813,47.498 27.813,46.355 24.892,43.434 19.685,43.434 17.78,43.434 16.129,45.085 ; 29.464,76.073 29.464,73.279 27.03,70.845 16.277,70.845 14.224,72.898 14.224,74.549 15.24,75.565 17.272,75.565 ; 29.464,76.2 27.813,77.851 19.558,77.851 17.272,75.565 ; 33.869,57.785 34.123,58.039 37.211,58.039 41.91,58.039 43.384,59.513 43.384,59.613 43.384,65.412 ; 43.434,65.532 44.069,66.167 49.911,66.167 51.181,66.167 56.388,60.96 56.388,56.769 54.61,54.991 39.116,54.991 24.257,40.132 17.653,40.132 12.446,45.339 10.795,45.339 9.777,46.357 9.777,46.611 9.777,51.308 10.033,51.308 11.938,53.213 13.462,53.213 16.129,50.546 16.129,45.72 22.098,45.72 22.606,46.228 22.606,57.023 40.64,75.057 46.99,75.057 56.896,75.057 65.151,66.802 73.787,66.802 74.676,67.691 74.676,68.959 73.445,70.19 73.445,73.543 74.543,74.642 79.906,74.642 80.004,74.544 ; 79.995,30.607 74.422,30.607 73.533,29.718 73.533,17.145 70.993,14.605 69.469,14.605 68.326,13.462 68.326,11.74 68.763,11.303 70.612,11.303 72.517,11.303 73.469,10.351 73.469,8.445 74.422,7.493 80.01,7.493

## Dimensions
0,79.999 to 0,0 on Mechanical 10
0,79.999 to 79.995,79.999 on Mechanical 10

## Text inside footprints (layer, text, board x,y; h text height)
C4: Mechanical 1 "R?" at 46.99,75.719 h0.5 r270
C19: Top Overlay "+" at 33.738,23.916 h2 r180
L3: Mechanical 1 "L?" at 54.784,43.245 h0.3 r180
P2: Mechanical 1 "4" at 2.794,48.325 h1.2 r90; Mechanical 1 "1" at 2.794,40.705 h1.2 r90; Mechanical 1 "HD?" at 2.49,44.819 h0.8 r90
P3: Mechanical 1 "1" at 2.286,61.533 h1.2 r270; Mechanical 1 "2" at 2.286,58.993 h1.2 r270; Mechanical 1 "HD?" at 2.59,59.959 h0.8 r270
R21: Mechanical 1 "R?" at 9.36,55.88 h0.5 r180
R30: Mechanical 1 "R?" at 60.49,20.639 h0.5 r180